# Altium PCB ATT-Open.PcbDoc
Units mm, origin at the board's own origin, x right, y up, seen from the top; angles counter-clockwise.
Board outline 140.3 x 94.24 mm, 2 copper layers (Top Layer, Bottom Layer); 105 components, 59 nets, 395 pads, 99 vias.
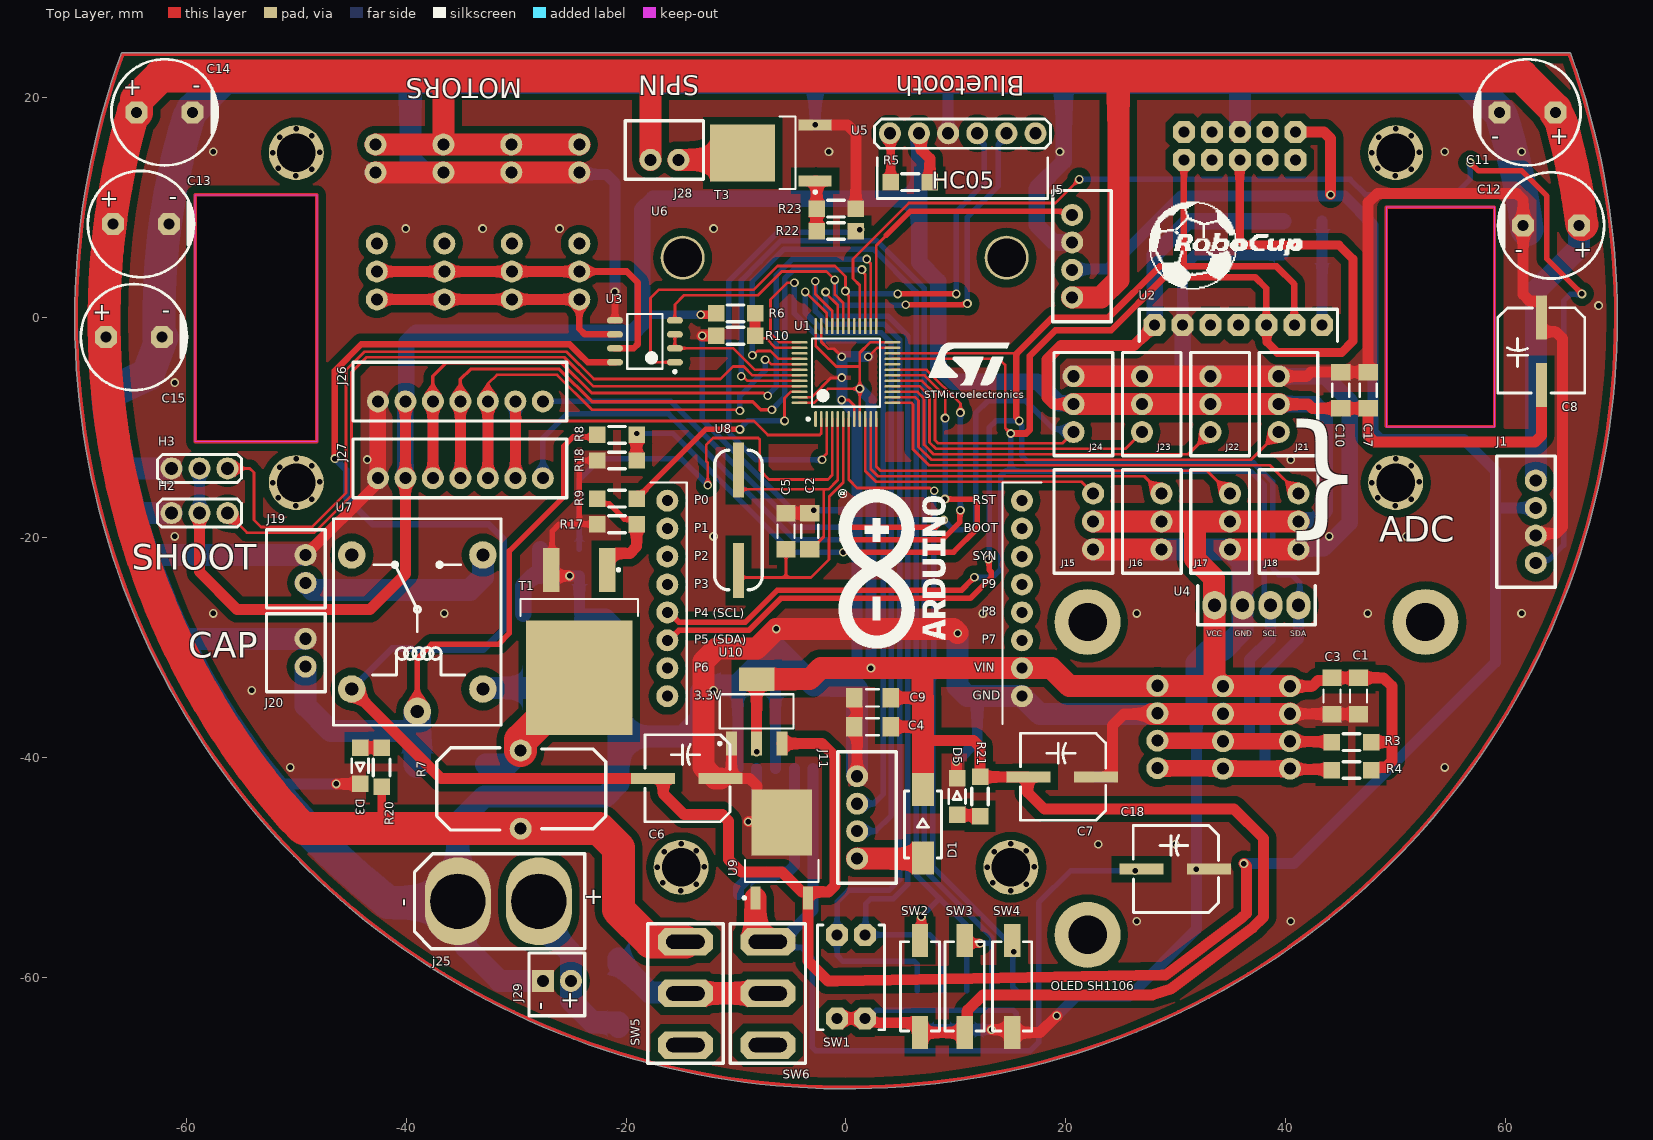
[diagram p0: Top Layer view]
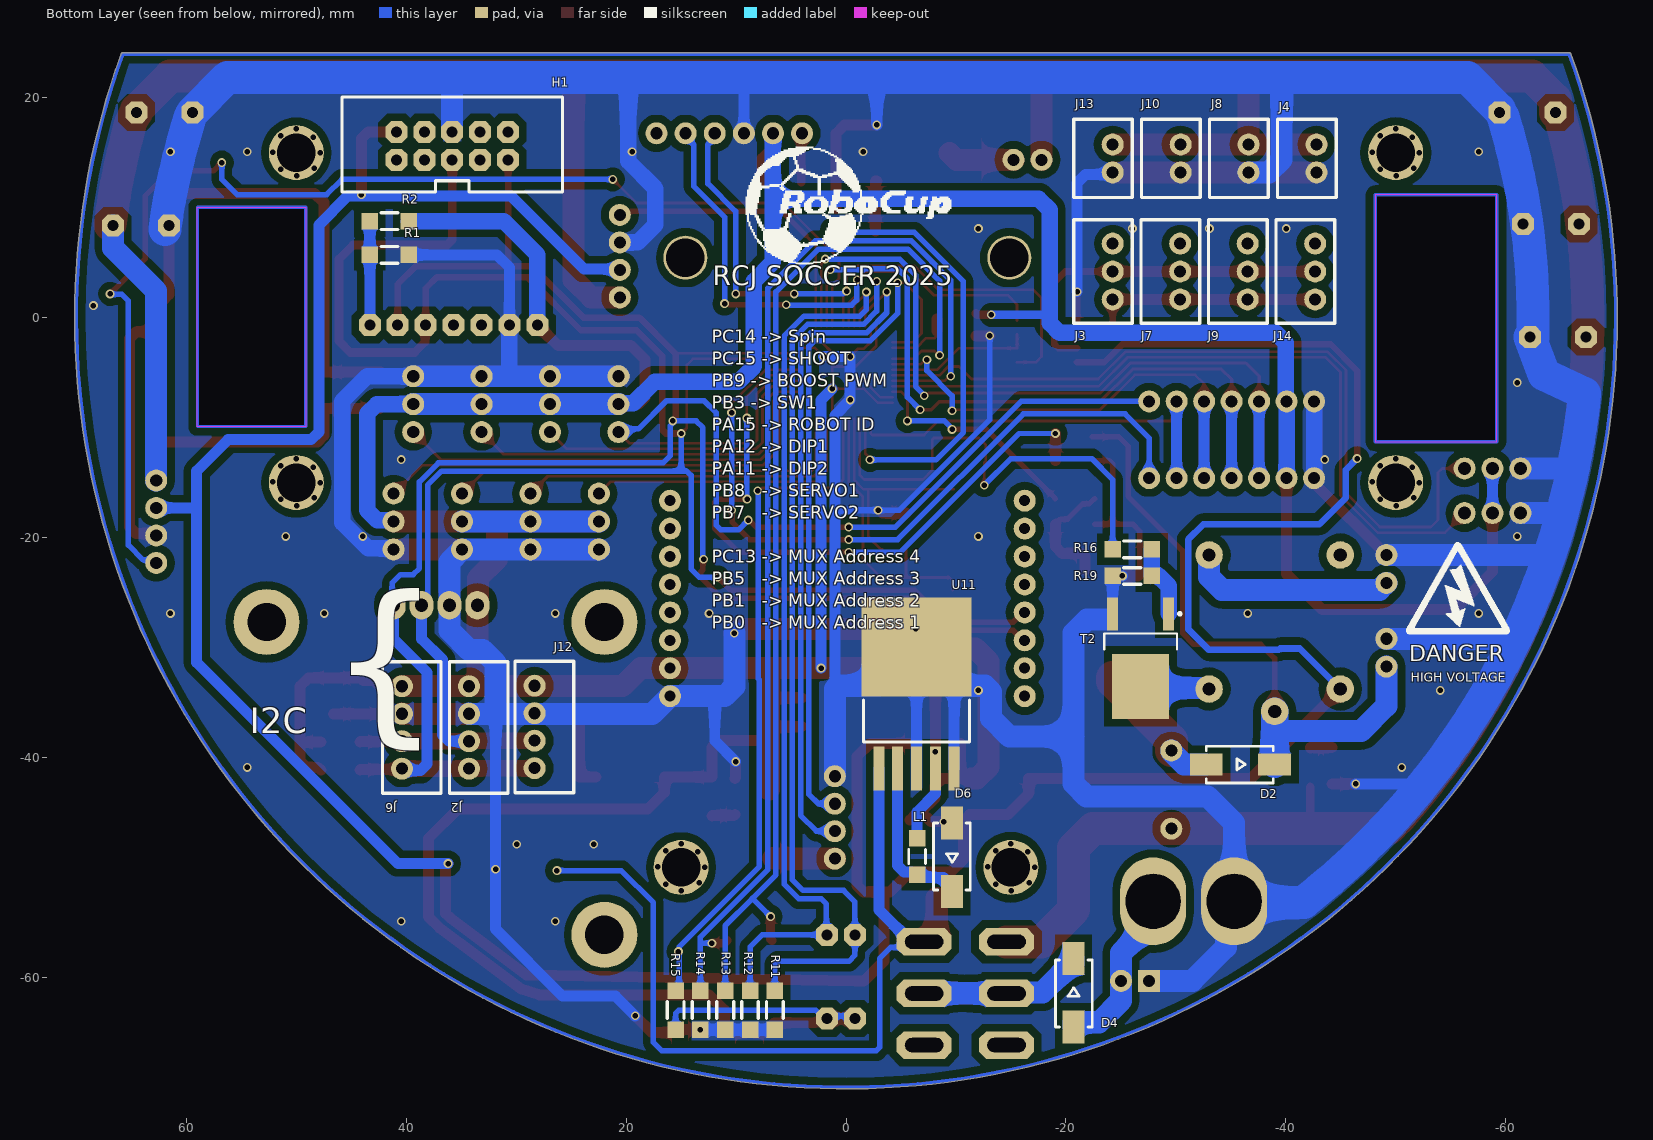
[diagram p1: Bottom Layer view, seen from below]

## Layer stack, top to bottom
Top Solder: solder mask 0.0102, Solder Resist, Dk 3.5
Top Layer: signal copper 0.0356
Dielectric 1: dielectric 0.32, FR-4, Dk 4.8
Bottom Layer: signal copper 0.0356
Bottom Solder: solder mask 0.0102, Solder Resist, Dk 3.5

## Board outline
-65.92,23.993 ccw(c0,0) 70.15,0 ccw(c0,0) 65.92,23.993 ccw(c65.778,23.941) 65.778,24.092 -65.778,24.092 ccw(c-65.778,23.941)
cut-out: 49.149,-9.906 58.987,-9.906 58.987,10.033 49.149,10.033
cut-out: -59.182,-11.303 -59.182,11.176 -48.133,11.176 -48.133,-11.303

## Design rules (kind name [scope] priority, off if disabled: settings)
Clearance [All] p1: gap=0.7 ignorepadtopadclearanceinfootprint=FALSE except(0: Arc-Hole Track-Hole SMDPad-Hole THPad-Hole Via-Hole Fill-Hole Poly-Hole Region-Hole Text-Hole; 0.25: Arc-Arc Arc-Track Arc-SMDPad Track-Track Track-SMDPad SMDPad-SMDPad; 0.254: Arc-THPad Arc-Via Arc-Text Track-THPad Track-Via Track-Text SMDPad-THPad SMDPad-Via SMDPad-Text THPad-THPad THPad-Via THPad-Text Via-Via Via-Text Fill-Text Poly-Text Region-Text Text-Text)
ComponentClearance [All] p1 off: gap=0.254 collisioncheckmode=3 verticalgap=0.254 showdistances=FALSE
Height [All] p1 off: minheight=0 maxheight=25.4 prefheight=12.7
PlaneConnect [All] p1: planeconnectstyle=Direct reliefexpansion=0.508 reliefentries=4 reliefconductorwidth=0.254 reliefairgap=0.254
PolygonConnect [All] p1: connectstyle=Direct reliefconductorwidth=0.254 reliefentries=4 polygonreliefangle="90 Angle" airgapwidth=0.254
RoutingVias [All] p1: holewidth=0.5 width=0.8 viastyle="Through Hole" minholewidth=0.5 minwidth=0.5 maxholewidth=0.5 maxwidth=1
SolderMaskExpansion [All] p1: expansion=0.102 istentingtop=FALSE
Width [All] p1: maxlimit=5 minlimit=0.25 preferedwidth=1
27 further rules are at their usual default settings.

## Classes and differential pairs
component class ATT-Open: C1 C2 C3 C4 C5 C6 C7 C8 C9 C10 C11 C12 C13 C14 C15 C17 C18 D1 D2 D3 D4 D5 D6 H1 H2 H3 J1 J2 J3 J4 J5 J6 J7 J8 J9 J10 J11 J12 J13 J14 J15 J16 J17 J18 J19 J20 J21 J22 J23 J24 j25 J26 J28 J29 L1 R1 R2 R3 R4 R5 R6 R7 R8 R9 R10 R11 R12 R13 R14 R15 R16 R17 R18 R19 R20 R21 R22 R23 SW1 SW2 SW3 SW4 SW5 SW6 T1 T2 T3 U1 U2 U3 U4 U5 U6 U7 U8 U9 U10 U11

## Components (designator, comment, footprint, x,y, rotation, side; value= is the part's Value field where it differs from the comment)
C1 "CAP" CAP1206 46.609,-34.417 r90 top
C2 "CAP" CAP1206 -3.302,-19.431 r90 top
C3 "CAP" CAP1206 44.196,-34.417 r90 top
C4 "CAP" CAP1206 2.413,-37.211 r0 top
C5 "CAP" CAP1206 -5.461,-19.431 r90 top
C6 "CAP" "CAP SMD 100uF 16V" -14.478,-41.91 r180 top
C7 "CAP" "CAP SMD 100uF 16V" 19.685,-41.783 r180 top
C8 "CAP" "CAP SMD 100uF 16V" 63.246,-3.048 r270 top
C9 "CAP" CAP1206 2.413,-34.586 r0 top
C10 "CAP" CAP1206 44.994,-6.604 r270 top
C11 "1000uF" "CAP 5x10x13 black" 61.976,18.669 r0 top
C12 "1000uF" "CAP 5x10x13 black" 64.135,8.382 r0 top
C13 "1000uF" "CAP 5x10x13 black" -64.135,8.509 r180 top
C14 "1000uF" "CAP 5x10x13 black" -61.976,18.669 r180 top
C15 "1000uF" "CAP 5x10x13 black" -64.77,-1.778 r180 top
C17 "CAP" CAP1206 47.498,-6.604 r270 top
C18 "CAP" "CAP SMD 100uF 16V" 29.95,-50.168 r180 top
D1 "DIODE" Diode 6.985,-46.101 r90 top
D2 "DIODE" Diode -35.814,-40.64 r180 bottom
D3 "LED" "LED GREEN 1206" -44.196,-40.767 r270 top
D4 "DIODE" Diode -20.701,-61.468 r90 bottom
D5 "LED" "LED GREEN 1206" 10.109,-43.561 r90 top
D6 "DIODE" Diode -9.652,-49.022 r270 bottom
H1 "IDC" "IDC 5x2" 35.941,16.002 r180 bottom
H2 "HEADER" "header 3 pin" -58.801,-17.78 r0 top
H3 "HEADER" "header 3 pin" -58.801,-13.716 r0 top
J1 "XH4" "XH 4PIN" 61.849,-18.559 r90 top
J2 "XH4" "XH 4PIN" 33.401,-37.281 r270 bottom
J3 "XH3" "XH 3PIN" -23.368,4.191 r90 bottom
J4 "XH2" "XH 2pin" -41.91,14.478 r90 bottom
J5 "XH4" "XH 4PIN" 21.463,5.588 r270 top
J6 "XH4" "XH 4PIN" 39.497,-37.281 r270 bottom
J7 "XH3" "XH 3PIN" -29.506,4.191 r90 bottom
J8 "XH2" "XH 2pin" -35.729,14.478 r90 bottom
J9 "XH3" "XH 3PIN" -35.645,4.191 r90 bottom
J10 "XH2" "XH 2pin" -29.549,14.478 r90 bottom
J11 "XH4" "XH 4PIN" 1.905,-45.466 r270 top
J12 "XH4" "XH 4PIN" 27.432,-37.234 r270 bottom
J13 "XH2" "XH 2pin" -23.368,14.478 r90 bottom
J14 "XH3" "XH 3PIN" -41.783,4.191 r90 bottom
J15 "XH3" "XH 3PIN" 21.59,-18.542 r90 top
J16 "XH3" "XH 3PIN" 27.813,-18.542 r90 top
J17 "XH3" "XH 3PIN" 34.036,-18.542 r90 top
J18 "XH3" "XH 3PIN" 40.259,-18.542 r90 top
J19 "XH2" "XH 2pin" -50.038,-22.86 r90 top locked
J20 "XH2" "XH 2pin" -50.038,-30.48 r90 top locked
J21 "XH3" "XH 3PIN" 40.251,-7.874 r270 top
J22 "XH3" "XH 3PIN" 34.03,-7.874 r270 top
J23 "XH3" "XH 3PIN" 27.81,-7.874 r270 top
J24 "XH3" "XH 3PIN" 21.59,-7.874 r270 top
j25 "XT60" XT60 -30.099,-53.086 r270 top
J26 "XH7" "XH 7PIN" -35.052,-9.144 r0 top
J27 "XH7" "XH 7PIN" -35.052,-16.129 r0 top
J28 "XH2" "XH 2pin" -16.51,15.24 r0 top
J29 "H2" "H2 MOLEX" -26.289,-60.706 r270 top
L1 "33uH" "Inductor 1206" -6.477,-49.022 r90 bottom
R1 "RES" RES1206 41.533,5.712 r0 bottom
R2 "RES" RES1206 41.533,8.766 r180 bottom
R3 "10K" RES1206 45.974,-38.608 r0 top
R4 "10K" RES1206 45.974,-41.148 r0 top
R5 "RES" RES1206 5.842,12.319 r180 top
R6 "10K" RES1206 -10.033,0.381 r180 top
R7 "100mH" inductor -29.718,-42.926 r90 top locked
R8 "10K" RES1206 -20.828,-10.666 r180 top
R9 "100" RES1206 -20.828,-16.468 r180 top
R10 "10K" RES1206 -10.033,-1.651 r0 top
R11 "10K" RES1206 6.477,-62.992 r270 bottom
R12 "10K" RES1206 8.731,-62.992 r270 bottom
R13 "10K" RES1206 10.983,-62.992 r270 bottom
R14 "10K" RES1206 13.237,-62.992 r270 bottom
R15 "10K" RES1206 15.491,-62.992 r90 bottom
R16 "100" RES1206 -26.035,-21.082 r0 bottom
R17 "10K" RES1206 -20.828,-18.796 r0 top
R18 "10K" RES1206 -20.828,-12.997 r0 top
R19 "10K" RES1206 -26.035,-23.498 r0 bottom
R20 "1K" RES1206 -42.228,-40.913 r270 top
R21 "1K" RES1206 12.192,-43.561 r90 top
R22 "100" RES1206 -0.889,7.874 r0 top
R23 "10K" RES1206 -0.889,9.906 r0 top
SW1 "DIP" "DIP Switch 2" 0.457,-60.071 r90 top
SW2 "Switch" pushbutton 6.731,-60.833 r90 top
SW3 "Switch" pushbutton 10.795,-60.833 r90 top
SW4 "Switch" pushbutton 15.113,-60.833 r90 top
SW5 "SW" "SPDT Switch" -14.732,-61.468 r0 top
SW6 "SW" "SPDT Switch" -7.239,-61.468 r0 top
T1 "IRF540" IRF540S -24.257,-29.591 r270 top
T2 "FDD" FDD6690A -26.797,-30.988 r270 bottom
T3 "FDD" FDD6690A -6.848,14.986 r180 top
U1 "STM32F103C8T6" STM32F103C8T6 0,-5 r90 top locked
U2 "TDAxis12" TDAxis12 35.687,10.414 r0 top locked
U3 "SN65LB" SN65LB -18.288,-2.159 r180 top
U4 "OLED" "OLED SH1106" 37.338,-41.91 r0 top locked
U5 "BT" HC05 10.597,11.464 r0 top
U6 "OpenMV" OpenMV 0,-15 r0 top locked
U7 "RELAY" "Relay 5V 10A" -38.989,-27.686 r270 top locked
U8 "Oscilator" "Crystal Oscilator" -9.779,-18.415 r90 top
U9 "7805" "7805 (SOT-252)" -5.842,-48.387 r90 top
U10 "1117" AMS1117 -8.128,-35.814 r90 top
U11 "LM2596" LM2596 -6.413,-32.512 r180 bottom
? "Comment" SCREW -50,-15 r0 top locked
? "Comment" SCREW -50,15 r0 top locked
? "Comment" SCREW -15,-50 r0 top locked
? "Comment" SCREW 15,-50 r0 top locked
? "Comment" SCREW 50,-15 r0 top locked
? "Comment" SCREW 50,15 r0 top locked

## Footprints (in the part's own frame and the unit in brackets; to place one, negate y for a bottom-side part, rotate by r counter-clockwise, add the part's x,y. Pads: shape width x height; smd on the part's side, far side on the other; paste and mask are expansions set on the pad)
"7805 (SOT-252)" [mm] "D-PAK, 3-Pads, Body 6.25x6.71mm (max), IPC Medium Density"
  rect 2.1x0.9 smd: 1(-4.4,2.4) 3(-4.4,-2.4)
  rect 6x5.5 smd: 4(2.45,0)
  silkscreen extent -4.52,-3.35 -0.95,3.52, body extent -5.06,-3.35 4.85,3.35, height 2.45
AMS1117 [mm] "SOT223, 4-Leads, Body 6.30x7.00mm (avg), Pitch 2.30mm, IPC Medium Density"
  rect 2.15x1 smd: 1(-2.925,2.3) 2(-2.925,0) 3(-2.925,-2.3)
  rect 2.15x3.25 smd: 4(2.925,0)
  silkscreen extent -3.05,-3.35 1.55,3.47, body extent -3.5,-3.35 3.5,3.35, height 1.65
CAP1206 [mm] "Chip Capacitor, 2-Leads, Body 3.20x1.60mm, IPC Medium Density"
  rect 1.5x1.75 smd: 1(-1.651,0) 2(1.651,0)
  silkscreen extent -0.6,-0.77 0.6,0.77, body extent -1.6,-0.8 1.6,0.8, height 1
"CAP 5x10x13 black" [mm]
  oct 2x2 hole 1: 1(-2.54,0) 2(2.54,0)
  silkscreen extent -4.83,-4.83 4.83,4.83, body extent -5,-5 5,5, height 13.1
"CAP SMD 100uF 16V" [mm]
  rect 4x1 smd: 1(-3.048,0) 2(3.07,0.003)
  silkscreen extent -3.94,-3.97 3.81,3.94, body extent -4.75,-4.15 4.75,4.15, height 10.51
"Crystal Oscilator" [mm]
  rect 5x1 smd: 1(-4.572,0) 2(4.572,0)
  silkscreen extent -6.35,-2.16 6.35,2.16, body extent -6.5,-2.35 6.5,2.35, height 4.21
Diode [mm]
  rect 3x2 smd: 1(-3.048,0) 2(3.175,0)
  silkscreen extent -3.06,-1.69 3.05,1.65, body extent -3.12,-1.78 3.12,1.78, height 2.26
"DIP Switch 2" [mm]
  oct 2x2 hole 1: 1(-3.683,1.27) 2(-3.683,-1.27) 3(3.937,1.27) 4(3.937,-1.27)
  silkscreen extent -4.7,-3.05 4.83,3.05, body extent -4.83,-3.3 5.07,3.3, height 6.8
FDD6690A [mm] "D-PAK, 3-Pads, Body 5.85x6.66mm (max), IPC Medium Density"
  rect 3x1 smd: 1(-4.05,2.54) 3(-4.05,-2.54)
  rect 5.9x5.2 smd: 4(2.55,0)
  silkscreen extent -4.17,-3.3 -0.8,3.69, body extent -5,-3.3 5,3.3, height 3.03
"H2 MOLEX" [mm]
  round 2 hole 1.1: 1(-0.381,1.27)
  rect 2x2 hole 1.1: 2(-0.381,-1.27)
  silkscreen extent -2.92,-2.54 2.79,2.54, body extent -2.9,-2.54 2.9,2.54, height 11.24
HC05 [mm]
  round 2 hole 1.1: 1(-6.605,5.3) 2(-3.956,5.3) 3(-1.308,5.3) 4(1.341,5.3) 5(3.99,5.3) 6(6.639,5.3)
  silkscreen extent -8,-0.64 8,6.6, body extent -8,-1 8,5.55, height 39.5
"header 3 pin" [mm]
  round 2 hole 1.2: 1(-2.54,0) 2(0,0) 3(2.54,0)
  silkscreen extent -3.81,-1.27 3.81,1.27, body extent -3.77,-1.25 3.73,1.25, height 8
"IDC 5x2" [mm]
  oct 2x2 hole 1: 1(-4.953,-1.651) 2(-4.953,0.889) 3(-2.413,-1.651) 4(-2.413,0.889) 5(0.127,-1.651) 6(0.127,0.889) 7(2.667,-1.651) 8(2.667,0.889) 9(5.207,-1.651) 10(5.207,0.889)
  silkscreen extent -9.91,-4.57 10.16,4.06, body extent -10.17,-4.78 10.43,4.32, height 9.3
inductor [mm]
  round 2 hole 1.1: 1(-3.556,-0.127) 2(3.556,-0.127)
  silkscreen extent -3.68,-7.87 3.81,7.49, body extent -4.15,-8.42 4.15,8.17, height 16.29
"Inductor 1206" [mm]
  rect 1.5x1.5 smd: 1(-1.651,0) 2(1.651,0)
  silkscreen extent -0.64,-0.76 0.64,0.76, body extent -1.1,-0.72 1.1,0.72, height 1.45
IRF540S [mm] "D2-PAK, 3-Pads, Body 7.93x8.70mm (max), IPC Medium Density"
  rect 4x1.5 smd: 1(-6.65,2.54) 3(-6.65,-2.54)
  rect 10.4x9.7 smd: 4(3.15,0)
  silkscreen extent -6.77,-5.35 -2.45,5.35, body extent -7.65,-5.33 7.6,5.33, height 5.08
"LED GREEN 1206" [mm]
  rect 1.5x1.5 smd: 1(-1.651,0) 2(1.651,0)
  silkscreen extent -0.64,-0.76 0.64,0.76, body extent -1.63,-0.83 1.64,0.82, height 0.9
LM2596 [mm]
  rect 1x4 smd: 1(-3.429,-8.509) 2(-1.715,-8.509) 3(0,-8.509) 4(1.714,-8.509) 5(3.429,-8.509)
  rect 10x9 smd: 6(0,2.54)
  silkscreen extent -4.83,-6.1 4.83,-2.29, body extent -5.1,-9.93 5.1,6.02, height 4.4
"OLED SH1106" [mm]
  oval 2.2x2.6 hole 1.2: 1(-3.81,15.748) 2(-1.27,15.748) 3(1.27,15.748) 4(3.81,15.748)
  round 6 hole 3.5: ""(-15.367,14.224) ""(-15.365,-14.23) ""(15.367,14.224)
  silkscreen extent -5.33,13.97 5.33,17.53, body extent -18,-17 18,17, height 11.6
OpenMV [mm]
  round 2 hole 1: 1(-16.256,-1.651) 2(-16.256,-4.191) 3(-16.256,-6.731) 4(-16.256,-9.271) 5(-16.256,-11.811) 6(-16.256,-14.351) 7(-16.256,-16.891) 8(-16.256,-19.431) 9(16.002,-19.431) 10(16.002,-16.891) 11(16.002,-14.351) 12(16.002,-11.811) 13(16.002,-9.271) 14(16.002,-6.731) 15(16.002,-4.191) 16(16.002,-1.651)
  round 4 hole 3.5: 17(14.605,20.447) 18(-14.859,20.447)
  silkscreen extent -17.78,-21.97 17.78,0, body extent -17.92,-22.12 17.9,23.58, height 38.95
pushbutton [mm]
  rect 3x1.5 smd: 1(-4.191,0) 2(4.191,0)
  silkscreen extent -4.06,-1.78 4.06,1.78, body extent -4.17,-1.82 4.17,1.82, height 4.25
"Relay 5V 10A" [mm]
  round 2.5 hole 1.2: 1(-6.096,5.969) 2(-6.096,-5.969) 3(6.096,-5.969) 4(6.096,5.969) 5(8.128,0)
  silkscreen extent -9.4,-7.62 9.4,7.62, body extent -9.6,-7.8 9.6,7.8, height 15.9
RES1206 [mm]
  rect 1.5x1.5 smd: 1(-1.778,0) 2(1.778,0)
  silkscreen extent -0.76,-0.76 0.76,0.76, body extent -1.58,-0.82 1.58,0.82, height 0.53
SCREW [mm]
  round 5 hole 3.5: 1(0,0)
  round 0 hole 0.5: ""(-2.159,0) ""(-1.651,-1.397) ""(-1.524,1.397) ""(-0.031,-2.11) ""(0,2.159) ""(1.397,-1.524) ""(1.397,1.524) ""(2.128,0.059)
SN65LB [mm] "SOP, 8-Leads, Body 4.90x3.90mm, Pitch 1.27mm, IPC Medium Density"
  oval 1.45x0.6 smd: 1(-2.725,1.905) 2(-2.725,0.635) 3(-2.725,-0.635) 4(-2.725,-1.905) 5(2.725,-1.905) 6(2.725,-0.635) 7(2.725,0.635) 8(2.725,1.905)
  silkscreen extent -2.85,-2.5 1.6,2.88, body extent -3,-2.5 3,2.5, height 1.75
"SPDT Switch" [mm]
  oct 5x2.5 hole 1.3 slot 3.5 at 0 deg: 1(0.127,4.699) 2(0.127,0) 3(0.127,-4.699)
  silkscreen extent -3.3,-6.35 3.56,6.35, body extent -3.3,-6.35 3.56,6.35, height 28.65
STM32F103C8T6 [mm] "TSQFP, 48-Leads, Body 7.00x7.00mm, Pitch 0.50mm, IPC Medium Density"
  oval 1.45x0.254 smd: 1(-4.224,2.762)
  oval 1.45x0.25 smd: 2(-4.225,2.25) 3(-4.225,1.75) 4(-4.225,1.25) 5(-4.225,0.75) 6(-4.225,0.25) 7(-4.225,-0.25) 8(-4.225,-0.75) 9(-4.225,-1.25) 10(-4.225,-1.75) 11(-4.225,-2.25) 12(-4.225,-2.75) 25(4.225,-2.75) 26(4.225,-2.25) 27(4.225,-1.75) 28(4.225,-1.25) 29(4.225,-0.75) 30(4.225,-0.25) 31(4.225,0.25) 32(4.225,0.75) 33(4.225,1.25) 34(4.225,1.75) 35(4.225,2.25) 36(4.225,2.75)
  oval 0.25x1.45 smd: 13(-2.75,-4.225) 14(-2.25,-4.225) 15(-1.75,-4.225) 16(-1.25,-4.225) 17(-0.75,-4.225) 18(-0.25,-4.225) 19(0.25,-4.225) 20(0.75,-4.225) 21(1.25,-4.225) 22(1.75,-4.225) 23(2.25,-4.225) 24(2.75,-4.225) 37(2.75,4.225) 38(2.25,4.225) 39(1.75,4.225) 40(1.25,4.225) 41(0.75,4.225) 42(0.25,4.225) 43(-0.25,4.225) 44(-0.75,4.225) 45(-1.25,4.225) 46(-1.75,4.225) 47(-2.25,4.225) 48(-2.75,4.225)
  silkscreen extent -4.35,-3.1 3.1,3.57, body extent -4.5,-4.5 4.5,4.5, height 1.6
TDAxis12 [mm]
  oct 2x2 hole 1: 1(-7.615,-11.093) 2(-5.075,-11.093) 3(-2.536,-11.093) 4(0.004,-11.093) 5(2.544,-11.093) 6(5.084,-11.093) 7(7.624,-11.093)
  silkscreen extent -9.02,-12.57 9.02,-9.65, body extent -10.5,-12.57 10.5,12.43, height 5.39
"XH 2pin" [mm]
  round 2 hole 1.1: 1(-1.27,-0.889) 2(1.27,-0.889)
  silkscreen extent -3.56,-2.67 3.56,2.67, body extent -3.7,-2.88 3.7,2.88, height 7
"XH 3PIN" [mm]
  round 2 hole 1.1: 1(-2.54,-0.889) 2(0,-0.889) 3(2.54,-0.889)
  silkscreen extent -4.7,-2.67 4.7,2.67, body extent -4.95,-2.88 4.95,2.88, height 7
"XH 4PIN" [mm]
  round 2 hole 1.1: 1(-3.753,-0.889) 2(-1.253,-0.889) 3(1.247,-0.889) 4(3.747,-0.889)
  silkscreen extent -5.97,-2.67 5.97,2.67, body extent -6.2,-2.88 6.2,2.88, height 7
"XH 7PIN" [mm]
  round 2 hole 1.1: 1(-7.523,1.524) 2(-5.023,1.524) 3(-2.523,1.524) 4(-0.023,1.524) 5(2.477,1.524) 6(4.977,1.524) 7(7.477,1.524)
  silkscreen extent -9.78,-0.25 9.65,5.08, body extent -9.95,-0.46 9.95,5.29, height 7
XT60 [mm]
  oval 8x6 hole 5: 1(0,2.159) 2(0,-5.207)
  silkscreen extent -4.32,-9.14 4.32,6.35, body extent -3.75,-9.72 3.75,6.83, height 16

## Part data
C1 C2 C3 C4 C5 C9 C10 C17: library part CAP1206, "Capacitor SMD 1206"
C6 C7 C8 C18: library part "CAP Electrolit SMD", "Capacitor Electrolit SMD"
C11 C12 C13 C14 C15: library part "Cap Electrolyte", "CAP DIP"
D1 D2 D4 D6: library part Diode
D3 D5: library part "LED SMD 1206", "LED SMD 1206"
H1: library part "IDC BOX 5x2", "IDC BOX 5x2"
H2 H3: library part "Header 3 pin"
J1 J2 J5 J6 J11 J12: library part "XH 4PIN", "XH Connector 4pins"
J3 J7 J9 J14 J15 J16 J17 J18 J21 J22 J23 J24: library part "XH 3PIN", "XH Connector 3pins"
J4 J8 J10 J13 J19 J20 J28: library part "XH 2PIN", "XH Connector 2pins"
j25: "XT60 Power Connector"
J26 J27: library part "XH 7Pin", "XH Connector 7pins"
J29: library part "H2 MOLEX", "molex connector"
L1: library part "Inductor 1206"
R1 R2 R3 R4 R5 R6 R8 R9 R10 R11 R12 R13 R14 R15 R16 R17 R18 R19 R20 R21 R22 R23: library part RES1206, "RESISTOR SMD"
R7: library part inductor, "SELF INDUCTOR"
SW1: library part "DIP SW 2", "DIP Switch 2 pin"
SW2 SW3 SW4: library part pushbutton, "Switch SMD Tact"
SW5 SW6: library part "SPDT Switch", "SPDT Power Switch"
T1: library part IRF540S, "IRF-540 MOSFET N-Chanel"
T2 T3: library part FDD6690A, "FDD6690A MOSFET N-Chanel"
U1: "STM32F103C8T6 / LQFP48"
U2: "Gyroscpoe Sensor"
U3: "BL DC MOTOR DRIVER"
U4: library part "OLED SH1106", "OLED SH1106 1.3inch"
U5: library part HC05, "Bluetooth HC05 Module"
U6: "OpenMV Camera H7 R2"
U7: library part "Relay 5V 10A"
U8: library part Crystal, "Crystal Oscilator 8MHz"
U9: library part "7805 (SOT-252)", "5v Regulator"
U10: library part AMS1117, "3.3v Regulator"
U11: "3.3v Regulator (Switching)"

## Via types
v1: diameter 0.8, hole 0.5, Top Layer to Bottom Layer, tented both sides, 99 vias

## Nets (pads, with @x,y where several pads share a name; then routed paths per layer and width w, separated by ;. In a path a pad name is that pad's centre, name@x,y a point inside that pad or via, vN(x,y) a via of type N, cw(c..) or ccw(c..) an arc to the next point about the centre after c; other vN are vias at no path point)
+5: C6.2 H1.2 J1.3 J5.3 U3.8 U7.3 U9.3 U10.3 | length 327.4
  Top Layer w0.6: v1(-46.482,-12.827) -46.482,-4.826 -44.088,-2.432 -25.14,-2.432 -24.27,-3.302 -24.257,-3.302 -23.495,-4.064 U3.8
  Top Layer w1: U7.3 -36.827,-41.913 C6.2 -16.617,-41.913 -16.617,-43.327 -14.732,-45.212 -11.254,-45.212 -10.668,-45.798 -10.668,-49.276 -9.525,-50.419 -5.81,-50.419 -3.992,-52.237 -3.492,-52.237 U9.3@-3.442,-52.287 ; U10.3 -2.177,-38.739 -1.016,-39.9 -1.016,-51.651 -1.602,-52.237 -3.392,-52.237 U9.3@-3.442,-52.287 ; v1(36.195,-49.657) 36.433,-49.895 36.433,-54.177 36.033,-54.577 29.075,-59.791 28.752,-59.797 -0.803,-60.345 -1.631,-60.345 -1.924,-60.052 -3.442,-58.534 U9.3 U9.3@-3.442,-52.287 ; H1.2 43.483,16.891 44.069,16.305 v1(44.069,11.176)
  Bottom Layer w0.6: v1(-46.482,-12.827) -45.466,-13.843 -45.466,-16.383 -43.053,-18.796 -32.512,-18.796 -31.115,-20.193 -31.115,-28.321 -33.02,-30.226 -39.37,-30.226 -39.497,-30.099 -41.275,-30.099 U7.3
  Bottom Layer w1: J5.3 20.638,4.405 23.836,4.405 30.48,11.049 45.339,11.049 47.949,8.439 47.949,-10.403 48.652,-11.106 56.191,-11.106 59.055,-13.97 59.055,-17.145 ; v1(36.195,-49.657) 40.767,-49.657 59.055,-31.369 59.055,-17.145 ; J1.3 59.222,-17.312 59.055,-17.145
+12: C11.2 C12.2 C13.2 C14.2 C15.2 J1.4 J4.2 J5.4 J8.2 J10.2 J13.2 J28.1 R7.1 R20.2 SW5.1 | length 340.6
  Top Layer w0.8: -42.291,-46.482 -42.228,-46.419 R20.2 ; -35.839,21.819 -35.687,21.971 ; -21.463,21.971 -21.412,21.92 ; 30.584,21.948 30.607,21.971 ; 44.679,21.819 44.831,21.971
  Top Layer w2: J4.2 J8.2 ; -35.839,21.819 -36.618,21.04 J8.2 ; J13.2 J10.2 J8.2 ; J28.1 -17.78,21.844 ; -16.129,21.844 -16.002,21.971 ; J5.4 23.177,1.841 24.765,3.429 24.765,21.971
  Top Layer w3: C14.2@-64.785,18.841 ccw(c0.932,-0.197) -50.369,-45.467 ccw(c0.932,-0.197) -50.306,-45.538 -50.241,-45.603 -49.362,-46.482 R7.1 -22.458,-46.482 -20.701,-48.239 -20.701,-53.848 -17.78,-56.769 SW5.1 ; C14.2 -64.516,19.833 -62.378,21.971 -35.687,21.971 -21.463,21.971 -16.002,21.971 30.607,21.971 44.831,21.971 61.468,21.971 C11.2@64.516,18.923 ; C11.2 64.521,18.665 64.578,18.593 cw(c62.225,16.733) 65.118,17.526 cw(c1.164,0.026) C12.2@66.93,8.46
  Bottom Layer w2: J1.4 62.738,2.413 66.675,6.35 C12.2
A: J3.1 J7.1 J9.1 J14.1 U3.6 | length 24.5
  Top Layer w0.6: J3.1 -24.257,-1.016 -23.749,-1.524 U3.6
  Top Layer w1: J14.1 J9.1 J7.1 J3.1
ADC0: J15.3 U1.10 | length 26.3
  Top Layer w0.25: U1.10 1.75,-13.959 2.721,-14.93 21.407,-14.93 J15.3
ADC1: J16.3 U1.11 | length 31.9
  Top Layer w0.25: U1.11 2.25,-13.752 2.928,-14.43 5.358,-14.43 27.13,-14.43 J16.3
ADC2: J17.3 U1.12 | length 37.5
  Top Layer w0.25: U1.12 2.75,-13.545 3.135,-13.93 32.853,-13.93 J17.3
ADC3: J18.3 U1.13 | length 42.7
  Top Layer w0.25: U1.13 5.95,-7.75 6.096,-7.896 6.096,-10.414 6.096,-11.972 7.554,-13.43 9.112,-13.43 38.576,-13.43 J18.3
ADC4: J21.3 U1.14 | length 41
  Top Layer w0.25: U1.14 6.303,-7.25 6.596,-7.543 6.596,-10.207 6.596,-11.765 7.761,-12.93 9.319,-12.93 36.846,-12.93 J21.3
ADC5: J22.3 U1.15 | length 34.6
  Top Layer w0.25: U1.15 6.51,-6.75 7.096,-7.336 7.096,-10 7.096,-11.558 7.968,-12.43 9.526,-12.43 31.125,-12.43 J22.3
ADC6: J23.3 U1.16 | length 28.2
  Top Layer w0.25: U1.16 6.717,-6.25 7.596,-7.129 7.596,-11.351 8.175,-11.93 25.405,-11.93 J23.3
ADC7: J24.3 J26.7 U1.17 | length 87.4
  Top Layer w0.25: U1.17 6.924,-5.75 8.096,-6.922 8.096,-11.144 8.382,-11.43 19.685,-11.43 J24.3
  Top Layer w0.5: v1(-0.254,-19.05) 8.174,-19.05 8.809,-18.415 v1(8.89,-18.415)
  Bottom Layer w0.5: J26.7 -15.92,-7.62 -4.49,-19.05 v1(-0.254,-19.05) ; v1(8.89,-18.415) 9.779,-19.304 11.375,-19.304 11.811,-18.868 11.811,-8.65 12.897,-7.563 16.326,-7.563 18.89,-10.127 20.414,-10.127 J24.3
ADC8: R8.1 R18.2 U1.18 | length 59.2
  Top Layer w0.25: U1.18 7.132,-5.25 9.017,-7.135 v1(9.017,-9.144)
  Top Layer w0.5: v1(-0.254,-21.336) 9.779,-21.336 11.938,-19.177 11.938,-16.803 11.645,-16.51 v1(9.002,-16.51)
  Top Layer w1: R18.2 v1(-19.05,-10.541)
  Bottom Layer w0.5: v1(-19.05,-10.541) -15.748,-10.541 -4.953,-21.336 v1(-0.254,-21.336) ; v1(9.002,-16.51) 9.009,-16.502 9.009,-9.152 v1(9.017,-9.144)
ADC9: J27.7 U1.19 | length 66.3
  Top Layer w0.25: U1.19 7.339,-4.75 10.414,-7.825 v1(10.414,-8.636)
  Top Layer w0.5: v1(-0.254,-20.193) 8.763,-20.193 10.357,-18.599 10.357,-17.583 v1(10.414,-17.526)
  Bottom Layer w0.25: v1@10.414,-17.653 v1(10.414,-17.526)
  Bottom Layer w0.5: J27.7 -27.575,-10.962 -25.376,-8.763 -16.129,-8.763 -4.699,-20.193 v1(-0.254,-20.193) ; v1(10.414,-17.526) v1(10.414,-8.636)
B: J3.2 J7.2 J9.2 J14.2 U3.7 | length 32
  Top Layer w0.6: J3.2 -19.939,4.191 -18.923,3.175 -18.923,-2.413 -19.304,-2.794 U3.7
  Top Layer w1: J14.2 J9.2 J7.2 J3.2
BOOST_CTRL: R9.1 U1.46 | length 20.1
  Top Layer w0.25: v1(-5.588,-9.398) -5.588,-7.306 -5.032,-6.75 U1.46
  Top Layer w0.5: R9.1 -12.759,-10.177 v1(-9.652,-10.177)
  Bottom Layer w0.5: v1(-9.652,-10.177) -9.652,-10.096 -8.954,-9.398 v1(-5.588,-9.398)
BOOT0: R14.1 SW3.2 U1.44 | length 103
  Top Layer w0.25: v1(-9.525,-5.334) -9.376,-5.334 -8.96,-5.75 U1.44
  Top Layer w0.8: SW3.2 11.049,-56.896 v1(12.192,-56.896)
  Bottom Layer w0.5: v1(-9.525,-5.334) -9.525,3.384 -7.817,5.092 -5.936,6.973 2.806,6.973 4.687,5.092 7.124,2.655 7.124,-50.232 13.237,-56.345 13.237,-57.023 ; v1@12.319,-56.896 13.11,-56.896 13.237,-57.023 ; R14.1 13.237,-57.023
DIP1: R12.1 SW1.4 U1.32 | length 82.3
  Top Layer w0.25: v1(-1.862,2.329) -1.862,2.243 -0.75,1.131 U1.32
  Bottom Layer w0.5: v1(-1.862,2.329) -1.862,0.719 -1.27,0.127 3.81,0.127 5.624,-1.687 5.624,-51.526 4.303,-52.847 2.271,-52.847 1.778,-53.34 1.778,-56.083 SW1.4 7.62,-56.134 8.731,-57.245 R12.1
DIP2: R11.1 SW1.3 U1.33 | length 86.7
  Top Layer w0.25: v1(-2.794,3.302) -2.794,2.159 -1.25,0.615 U1.33
  Bottom Layer w0.5: v1@-2.794,3.294 -2.794,0.59 -1.581,-0.623 3.499,-0.623 4.874,-1.998 4.874,-51.133 3.91,-52.097 0.227,-52.097 -0.813,-53.137 SW1.3 -0.813,-57.988 -0.254,-58.547 6.223,-58.547 6.477,-58.801 R11.1
EXT_SHOOT: J1.1 U1.28 | length 114
  Top Layer w0.25: U1.28 1.25,2.941 0.635,3.556 0.635,5.334 5.715,10.414 19.05,10.414 v1(21.209,12.573)
  Top Layer w0.5: v1(56.769,14.097) 57.531,13.335 61.468,13.335 63.754,11.049 63.754,5.334 v1(66.929,2.159)
  Bottom Layer w0.5: v1(21.209,12.573) 45.847,12.573 47.244,11.176 55.372,11.176 56.769,12.573 v1(56.769,14.097) ; J1.1 63.011,-22.039 63.94,-22.039 65.278,-20.701 65.278,1.524 65.856,2.102 66.872,2.102 v1(66.929,2.159)
GND: C1.1 C2.2 C3.1 C4.1 C5.2 C6.1 C7.1 C8.1 C9.1 C10.1 C11.1 C12.1 C13.1 C14.1 C15.1 C17.1 C18.1 D3.2 D5.2 D6.1 H1.6 H2.1 H3.1 J1.2 J2.2 J4.1 J5.2 J6.2 J8.1 J10.1 J11.1 J12.2 J13.1 J15.1 J16.1 J17.1 J18.1 J19.2 J20.2 J21.1 J22.1 J23.1 J24.1 j25.2 J26.1 J27.1 J29.2 R1.1 R10.1 R11.2 R12.2 R13.2 R14.2 R17.1 R18.1 R19.2 R23.2 SW4.1 T1.3 T2.3 T3.3 U1.8 U1.23 U1.35 U1.47 U2.2 U3.5 U4.2 U5.3 U6.9 U9.4 U10.1 U11.3 U11.5 U11.6 | length 951.4
  Top Layer w0.25: U1.47 -3.131,-7.25 -1.342,-5.461 v1(-0.381,-5.461) ; U1.35 -2.25,-2.195 -1.622,-2.823 -1.114,-2.823 v1(-0.381,-3.556) ; v1(-0.381,-7.493) 0.254,-7.493 0.75,-7.989 U1.8 ; v1(2.032,-3.556) 2.838,-2.75 U1.23
  Top Layer w0.5: T1.3 -26.729,-22.873 -26.729,-19.441 -26.084,-18.796 -24.257,-18.796 ; R17.1 -24.257,-18.796 ; R18.1 -23.964,-12.997 -24.257,-13.29 -24.257,-18.796
  Top Layer w0.6: U3.5 v1(-21.013,2.355)
  Top Layer w1: J19.2 -42.766,-15.207 -42.766,-14.796 J27.1 ; v1(-46.355,-42.418) D3.2 ; T1.3 -26.797,-23.245 -26.547,-23.495 v1(-25.146,-23.495) ; v1(-13.081,-1.651) R10.1 ; C6.1 C6.1@-10.428,-41.91 ; U10.1 C6.1@-10.428,-41.91 ; v1(-8.89,-45.847) -7.747,-45.847 U9.4@-7.366,-45.466 ; U9.4@-6.84,-44.939 -8.092,-43.687 -8.092,-42.581 -8.763,-41.91 C6.1@-10.428,-41.91 ; U9.4@-6.271,-45.258 U9.4@-5.842,-45.687 ; C5.2 C2.2 ; v1(-2.798,17.526) 0.127,17.526 0.889,16.764 R23.2 ; C9.1 0.762,-34.711 1.016,-34.965 J11.1 ; v1(10.033,-40.386) 10.033,-41.834 D5.2 ; v1(13.237,-64.77) 14.863,-64.77 15.113,-65.02 SW4.1 17.653,-65.024 v1(19.177,-63.5) ; J24.1@20.637,-5.27 J24.1 ; C7.1 24.233,-41.783 24.233,-37.108 25.273,-36.068 J12.2@27.813,-36.068 ; 30.607,-5.334 30.612,-5.329 ; J21.1 41.935,-5.334 42.316,-4.953 C10.1 C17.1 ; J6.2 40.406,-36.048 46.589,-36.048 C1.1 ; C17.1@47.498,-4.703 47.498,10.463 48.338,11.303 61.009,11.303 61.595,10.717 C12.1 61.595,2.086 62.181,1.5 63.246,1.5 C8.1 ; C17.1@47.502,-4.953 C17.1 ; C17.1@47.873,-4.578 47.873,-4.703 47.623,-4.953 C17.1 ; J1.2 62.929,-19.621 64.565,-19.621 65.151,-19.035 65.151,-1.888 64.565,-1.302 C8.1@63.246,-1.302
  Top Layer w1.5: J27.1 J26.1
  Top Layer w2: J4.1 J8.1 J10.1 J13.1 ; C6.1 -11.93,-41.91 -12.954,-40.886 -12.954,-31.271 -11.782,-30.099 -8.128,-30.099 v1(-6.35,-28.321) 9.779,-28.321 v1(10.16,-28.702) ; J24.1 J23.1 30.607,-5.334 J22.1 J21.1 ; J15.1 J16.1 ; J12.2@27.813,-36.068 40.346,-36.068 J6.2 ; J17.1 J18.1
  Top Layer w3: j25.2@-35.433,-53.213 j25.2
  Bottom Layer w0.5: v1(-13.081,-1.651) -13.081,-9.271 -4.826,-17.526 v1(-2.921,-17.526)
  Bottom Layer w0.6: v1(-2.921,-17.526) 1.016,-17.526
  Bottom Layer w1: -52.815,-42.075 -52.472,-42.418 v1(-46.355,-42.418) ; v1(-25.146,-23.495) -24.26,-23.495 R19.2 T2.3 ; J13.1 -24.066,13.017 -21.78,13.017 -21.013,12.25 v1(-21.013,2.355) ; U11.5 U11.6@-9.842,-33.401 ; U11.3 U11.6 ; v1(-2.798,17.526) -2.798,21.844 ; 1.016,-33.782 1.016,-17.526 1.016,-8.89 v1(-0.381,-7.493) v1(-0.381,-5.461) v1(-0.381,-3.556) v1(2.032,-3.556) ; R11.2 R12.2 R13.2 v1(13.237,-64.77) ; U5.3 9.289,21.481 9.652,21.844 ; v1(10.033,-40.386) 11.938,-38.481 11.938,-34.431 ; v1(19.177,-63.5) 20.955,-61.722 25.781,-61.722 31.877,-55.626 v1(31.877,-50.165) 31.877,-36.068 ; U2.2 30.612,4.577 31.747,5.712 R1.1
  Bottom Layer w1.5: -66.793,-9.994 -66.753,-10.033 ; J19.2 J19.2@-49.053,-21.494 ; J27.1@-42.671,-14.701 J27.1 J26.1 ; 19.812,21.844 19.812,14.224 17.33,11.742 17.33,8.451 18.94,6.841 J5.2 ; J24.1@20.637,-5.27 J24.1 ; U2.2 30.612,-5.212 30.734,-5.334 ; J21.1 43.561,-5.334 45.819,-7.592 45.819,-18.642 43.475,-20.986 41.244,-20.986 J18.1
  Bottom Layer w2: -66.155,-13.586 -66.025,-13.716 H3.1 ; -65.134,-17.845 -65.069,-17.78 H2.1 ; -64.068,-21.356 -63.834,-21.59 J19.2 ; -60.927,-29.128 -60.845,-29.21 J20.2 ; -39.624,21.844 -39.624,14.38 -38.452,13.208 J8.1 ; J29.2 -31.496,-60.325 -34.541,-57.28 -34.541,-53.851 j25.2 -35.306,-45.974 -32.893,-43.561 -21.873,-43.561 -20.701,-42.389 -20.701,-38.1 ; T2.3@-23.757,-27.438 -21.938,-27.438 -20.701,-28.675 -20.701,-38.1 ; J11.1 1.016,-33.782 0.706,-33.472 -2.913,-33.472 U11.6 -9.842,-33.401 -9.914,-33.472 -12.644,-33.472 -13.208,-34.036 -13.208,-36.449 -14.859,-38.1 -20.701,-38.1 ; v1(10.16,-28.702) 10.16,-33.556 11.035,-34.431 11.938,-34.431 U6.9 17.639,-36.068 31.877,-36.068 ; J24.1 J23.1 J22.1 J21.1 ; J15.1 J16.1 J17.1 36.068,-22.225 U4.2 36.068,-28.448 34.29,-30.226 33.049,-30.226 31.877,-31.398 31.877,-36.068 ; J2.2 34.25,-36.068 31.877,-36.068 ; H1.6 35.814,21.717 35.941,21.844
  Bottom Layer w3: C15.1@-62.473,-1.822 cw(c0,0) C14.1@-59.769,18.273 ; C15.1@-62.234,-1.778 -63.479,-5.177 -67.184,-6.895 ccw(c-0.037,0.005) -66.793,-9.994 ccw(c-0.037,0.005) -66.155,-13.586 ccw(c-0.037,0.005) -65.134,-17.845 ccw(c-0.037,0.005) -64.068,-21.356 ccw(c-0.037,0.005) -60.927,-29.128 ccw(c-0.037,0.005) -52.815,-42.075 ccw(c-0.037,0.005) -41.875,-52.965 ; C14.1@-59.436,18.923 -56.515,21.844 -39.624,21.844 -2.798,21.844 9.652,21.844 19.812,21.844 35.941,21.844 56.261,21.844 C11.1 ; -41.656,-53.213 j25.2@-35.433,-53.213 ; C11.1@59.589,18.419 cw(c2.328,-0.068) C12.1@61.954,8.015
  other v1: 26.452,-54.907 40.452,-54.907 22.952,-47.907 29.952,-47.907 -50.548,-40.907 54.452,-40.907 -54.048,-33.907 -12.048,-33.907 -57.548,-26.907 -36.548,-26.907 12.452,-26.907 26.452,-26.907 47.452,-26.907 61.452,-26.907 -61.048,-19.907 -12.048,-19.907 43.952,-19.907 50.952,-19.907 -43.548,-12.907 40.452,-12.907 -61.048,-5.907 68.452,1.093 -40.048,8.093 -33.048,8.093 -26.048,8.093 -12.048,8.093 -57.548,15.093 -1.548,15.093 19.452,15.093 54.452,15.093 61.452,15.093
ID: R6.1 R10.2 U1.38 | length 5.6
  Top Layer w0.25: R10.2 -8.038,-1.868 -7.276,-1.868 -6.394,-2.75 -4.825,-2.75 U1.38
  Top Layer w1: R10.2@-8.255,-1.231 R6.1@-8.255,-0.127
IO: U1.42 U3.2 U3.3 | length 13.4
  Top Layer w0.25: U3.3 U3.2 -10.246,-2.794 -8.29,-4.75 U1.42
MUX_ADD1: J26.3 J27.3 U1.26 | length 74.8
  Top Layer w0.25: v1(1.89,5.319) 1.89,5.258 2.25,4.898 U1.26
  Top Layer w0.3: J26.3 -37.575,-5.317 -36.39,-4.132 -25.844,-4.132 -23.118,-6.858 -7.501,-6.858 -7.247,-7.112 v1(-7.112,-7.112)
  Top Layer w1: J27.3 J26.3
  Bottom Layer w0.5: v1(-7.112,-7.112) -7.112,-7.034 -6.338,-6.26 -6.338,3.86 -4.879,5.319 v1(1.89,5.319)
  Bottom Layer w1: J27.3 J26.3
MUX_ADD2: J26.4 J27.4 U1.27 | length 71.3
  Top Layer w0.25: v1(1.443,4.364) 1.443,4.215 1.75,3.909 U1.27
  Top Layer w0.3: J26.4 -35.075,-5.611 -34.146,-4.682 -26.072,-4.682 -23.092,-7.662 -8.467,-7.662 -7.747,-8.382 v1(-6.731,-8.382)
  Top Layer w1: J27.4 J26.4
  Bottom Layer w0.5: v1(-6.731,-8.382) -5.588,-7.239 -5.588,3.549 -4.692,4.445 -1.705,4.445 -1.625,4.364 v1(1.443,4.364)
  Bottom Layer w1: J27.4 J26.4
MUX_ADD3: J26.5 J27.5 U1.41 | length 49.1
  Top Layer w0.25: J26.5 -32.553,-7.598 -32.553,-6.01 -31.75,-5.207 -26.289,-5.207 -23.114,-8.382 -9.736,-8.382 v1(-9.652,-8.466) ; v1(-7.366,-3.827) -7.217,-3.827 -6.794,-4.25 U1.41
  Top Layer w1: J27.5 J26.5
  Bottom Layer w0.5: v1(-9.652,-8.466) -9.652,-7.112 -7.366,-4.826 v1(-7.366,-3.827)
  Bottom Layer w1: J27.5 J26.5
MUX_ADD4: J26.6 J27.6 U1.2 | length 43.9
  Top Layer w0.25: -30.075,-8.914 -29.591,-9.398 -8.382,-9.398 -7.112,-10.668 -2.396,-10.668 -2.25,-10.522 U1.2
  Top Layer w1: J27.6 -30.075,-8.914 J26.6
  Bottom Layer w1: J27.6 J26.6
NetC18_2: C18.2 SW6.1 U9.1 U11.1 | length 79.3
  Top Layer w2: U9.1 -8.242,-56.019 -7.492,-56.769 SW6.1
  Bottom Layer w0.5: SW6.1 -6.591,-57.29 -4.051,-57.29 -3.048,-58.293 -3.048,-66.382 -2.755,-66.675 16.764,-66.675 17.526,-65.913 17.526,-53.213 20.447,-50.292 v1(26.289,-50.292)
  Bottom Layer w1: SW6.1 -5.862,-56.769 -2.984,-53.892 U11.1
NetD1_1: D1.1 J11.4 | length 5.7
  Top Layer w2: J11.4 6.604,-49.213 D1.1@6.604,-49.149
NetD2_1: D2.1 R7.2 T1.4 | length 12.6
  Top Layer w3: R7.2 -29.591,-38.425 -24.257,-33.091 T1.4
  Bottom Layer w2: D2.1 -30.763,-40.64 -29.591,-39.468 R7.2
NetD3_1: D3.1 R20.1 | length 2
  Top Layer w1: D3.1 -42.247,-39.116 R20.1
NetD4_1: D4.1 j25.1 J29.1 | length 15.8
  Bottom Layer w2: j25.1 -27.94,-54.864 -25.019,-57.785 -25.019,-62.103 -23.025,-64.097 -20.701,-64.097 D4.1
NetD4_2: D4.2 SW5.2 SW6.2 | length 22.7
  Top Layer w2: SW5.2 SW6.2
  Bottom Layer w2: D4.2 -20.701,-58.793 -20.455,-58.793 -17.876,-61.372 -14.701,-61.372 SW5.2 SW6.2
NetD5_1: D5.1 R21.1 | length 2.1
  Top Layer w1: D5.1 10.173,-45.276 12.128,-45.276 R21.1
NetD6_2: D6.2 L1.1 U11.2 | length 15.1
  Bottom Layer w1: D6.2@-9.779,-52.451 -9.779,-51.824 -8.878,-50.923 -6.727,-50.923 L1.1 ; L1.1@-6.223,-50.673 -5.973,-50.423 -5.285,-50.423 -4.699,-49.837 U11.2
NetJ19_1: J19.1 U7.1 | length 18.9
  Bottom Layer w2: J19.1 -48.514,-24.765 -34.199,-24.765 -33.027,-23.593 -33.027,-21.597 U7.1
NetJ28_2: J28.2 T3.4 | length 6.1
  Top Layer w2: J28.2 -10.033,14.351 T3.4
NetR1_2: R1.2 R2.1 U2.7 | length 9.4
  Bottom Layer w1: U2.7 R1.2 R2.1
NetR5_2: R5.2 U5.1 | length 4.5
  Top Layer w0.8: U5.1 4.064,16.692 R5.2
NetR9_2: R9.2 R17.2 T1.1 | length 10.8
  Top Layer w0.5: R9.2 -22.122,-16.952 -21.529,-16.952 -20.148,-18.333 -19.513,-18.333 R17.2
  Top Layer w1: T1.1 -21.717,-21.691 -21.467,-21.441 -19.663,-21.441 -19.05,-20.828 R17.2
NetR16_1: R16.1 R19.1 T2.1 | length 6.9
  Bottom Layer w1.5: T2.1 -29.337,-24.376 -28.458,-23.498 R19.1 R16.1
NetR22_1: R22.1 R23.1 T3.1 | length 4.7
  Top Layer w1: T3.1 -2.667,12.446 R23.1 R22.1
NetT2_4: T2.4 U7.4 | length 6.3
  Bottom Layer w2: U7.4 -32.924,-33.686 -26.945,-33.686 T2.4
NRST: R15.2 SW4.2 U1.7 | length 62.4
  Top Layer w0.25: U1.7 0.25,-14.728 1.016,-15.494 7.625,-15.494 7.879,-15.748 v1(8.028,-15.748)
  Bottom Layer w0.5: v1(8.028,-15.748) 7.986,-15.79 7.986,-32.84 7.874,-32.952 7.874,-49.921 15.181,-57.229 15.181,-57.657 15.181,-60.904 R15.2
  other v1: 15.239,-57.657
OSC_IN: C2.1 U1.5 U8.2 | length 21
  Top Layer w0.25: U8.2@-9.779,-15.621 -1.905,-15.621 ; C2.1 -3.177,-21.082 -2.024,-19.929 -2.024,-15.74 -1.905,-15.621 ; U1.5 -0.75,-14.775 -1.596,-15.621 -1.905,-15.621
OSC_OUT: C5.1 U1.6 U8.1 | length 25.7
  Top Layer w0.25: U8.1@-9.714,-24.765 -9.714,-23.942 -9.404,-23.632 -5.461,-23.632 ; C5.1 -5.461,-23.632 ; U1.6 -0.25,-14.982 -1.524,-16.256 -1.524,-20.136 -1.541,-20.153 -1.541,-21.988 -3.185,-23.632 -5.461,-23.632
RCJ_COM: J5.1 U1.25 | length 26.6
  Top Layer w0.25: U1.25 2.75,6.56 3.683,7.493
  Top Layer w0.5: 3.683,7.493 5.842,9.652 19.531,9.652 19.555,9.628 20.287,9.628 J5.1
RX: U1.30 U3.1 U5.4 | length 57.8
  Top Layer w0.25: U3.1 -17.272,-4.064 -17.78,-3.556 -17.78,1.778 -17.018,2.54 -8.382,2.54 -6.231,4.691 -1.008,4.691 -0.054,3.737 v1(-0.054,2.416) -0.054,2.267 0.25,1.963 U1.30
  Top Layer w0.5: v1(4.699,2.159) v1(10.033,2.159)
  Bottom Layer w0.5: v1(-0.054,2.416) 0.027,2.416 0.284,2.159 v1(4.699,2.159) ; v1(10.033,2.159) 10.033,9.652 12.573,12.192 12.573,15.723 11.938,16.358 U5.4
SCL: H1.5 J2.3 J6.3 J12.3 R3.1 U1.21 U2.5 U4.3 U6.5 | length 201.7
  Top Layer w0.25: U1.21 13.91,-3.75 14.478,-4.318 14.478,-10.033 v1(14.986,-10.541)
  Top Layer w0.5: U6.5 -16.088,-26.811 -15.213,-27.686 -9.144,-27.686 -6.235,-24.777 10.529,-24.777 v1@11.43,-23.876
  Top Layer w0.6: v1(14.986,-10.541) 16.379,-10.541 16.73,-10.19 16.73,-3.463 19.05,-1.143 24.13,-1.143 28.956,3.683 37.211,3.683 38.231,2.663 U2.5
  Top Layer w0.8: H1.5 35.814,7.073 36.283,6.604 44.831,6.604 46.101,5.334 46.101,-2.159 45.085,-3.175 39.243,-3.175 38.287,-2.219 38.287,-0.735 U2.5
  Top Layer w1: J6.3 40.426,-38.568 44.156,-38.568 R3.1
  Top Layer w1.5: J12.3 28.345,-38.505 34.266,-38.505 J2.3 J6.3
  Bottom Layer w0.3: U4.3 U4.3@38.608,-25.448
  Bottom Layer w0.5: v1(11.684,-23.622) 13.335,-23.622 14.097,-22.86 14.097,-14.351 14.49,-13.958 14.986,-13.958 ; v1(14.986,-10.541) 14.986,-13.958 ; U4.3 38.058,-25.612 38.058,-15.243 36.773,-13.958 14.986,-13.958
  Bottom Layer w1: J2.3 36.117,-38.528 36.703,-37.942 36.703,-31.115 38.608,-29.21 U4.3
SDA: H1.9 J2.4 J6.4 J12.4 R4.1 U1.22 U2.6 U4.4 U6.6 | length 183.4
  Top Layer w0.25: U1.22 15.494,-3.25
  Top Layer w0.5: U6.6 -16.116,-29.351 -15.213,-28.448 -8.845,-28.448 -5.924,-25.527 11.303,-25.527 13.193,-23.637 13.193,-23.137 13.011,-22.955 13.011,-22.028 v1(12.954,-21.971)
  Top Layer w0.6: v1(15.765,-9.398) 15.765,-9.344 15.494,-9.073 15.494,-3.302 15.765,-3.031 18.796,0 23.876,0 28.536,4.66 30.734,4.66 ; H1.9 30.734,4.66 ; U2.6 40.771,3.044 39.155,4.66 30.734,4.66
  Top Layer w1: J6.4 40.446,-41.088 44.136,-41.088 R4.1
  Top Layer w1.5: J12.4 28.345,-41.004 34.266,-41.004 J2.4 J6.4
  Bottom Layer w0.5: v1(12.954,-21.971) 13.011,-21.914 13.011,-10.014 13.628,-9.398 v1(15.765,-9.398) ; v1@15.546,-9.398 16.002,-9.854 16.002,-12.573 16.637,-13.208 37.084,-13.208 38.808,-14.932 38.808,-22.806 39.37,-23.368 40.513,-23.368 41.275,-24.13 U4.4@41.275,-26.543
  Bottom Layer w1: J6.4 40.221,-41.193 38.686,-41.193 38.1,-40.607 38.1,-32.258 41.148,-29.21 U4.4
SERVO1: H2.3 U1.45 | length 67
  Top Layer w0.25: H2.3 -54.483,-19.558 -48.354,-19.558 -44.966,-16.17 -44.966,-4.972 -43.601,-3.607 -25.626,-3.607 -22.983,-6.25 U1.45
SERVO2: H3.3 U1.43 | length 71.8
  Top Layer w0.25: H3.3 -54.229,-13.716 -53.848,-14.097 -53.848,-18.415 -53.213,-19.05 -48.554,-19.05 -45.466,-15.962 -45.466,-4.765 -43.808,-3.107 -25.419,-3.107 -22.938,-5.588 -11.43,-5.588 -10.287,-4.445 -9.302,-4.445 -8.497,-5.25 U1.43
SHOOT: R16.2 U1.4 | length 43.7
  Top Layer w0.25: v1(-12.573,-15.24) -12.573,-13.197 -12.7,-13.07 -12.7,-11.557 -12.099,-10.956 -7.989,-10.956 -7.842,-11.102 -7.842,-13.875 -6.985,-14.732 -1.651,-14.732 -1.25,-14.331 U1.4
  Bottom Layer w0.5: R16.2 -24.257,-14.732 -22.352,-12.827 -14.986,-12.827 v1(-12.573,-15.24)
SPIN: R22.2 U1.3 | length 41.5
  Top Layer w0.25: v1(-2.18,-12.933) -2.18,-12.785 -1.75,-12.355 U1.3
  Top Layer w0.6: R22.2 1.143,7.874 v1(1.27,8.001)
  Bottom Layer w0.5: v1(-2.18,-12.933) -8.174,-12.933 -10.668,-10.439 -10.668,3.302 -6.223,7.747 0.935,7.747 1.189,8.001 v1(1.27,8.001)
SW1: R13.1 SW2.2 U1.40 | length 99.2
  Top Layer w0.25: v1(-8.509,-3.429) -8.429,-3.429 -8.048,-3.048 -6.858,-3.048 -6.156,-3.75 U1.40
  Top Layer w0.8: SW2.2 6.858,-56.515 v1(6.858,-54.483)
  Bottom Layer w0.5: v1(-8.509,-3.429) -8.509,3.34 -5.626,6.223 2.495,6.223 6.374,2.344 6.374,-50.697 8.509,-52.832 ; v1(6.858,-54.483) 8.509,-52.832 ; R13.1 10.983,-55.306 8.509,-52.832
SWCLK: J11.2 U1.37 | length 64.4
  Top Layer w0.25: v1(-4.684,3.175) -5.334,3.175 -6.858,1.651 -6.858,-1.452 -6.06,-2.25 U1.37
  Bottom Layer w0.5: v1(-4.684,3.175) -4.699,3.16 -4.699,0.374 -2.202,-2.123 2.878,-2.123 3.374,-2.619 3.374,-43.362 2.523,-44.213 J11.2
SWIO: J11.3 U1.34 | length 61.5
  Top Layer w0.25: v1(-3.706,2.341) -3.683,2.341 -1.75,0.408 U1.34
  Bottom Layer w0.5: v1(-3.706,2.341) -3.706,0.442 -1.891,-1.373 3.189,-1.373 4.124,-2.308 4.124,-45.279 2.69,-46.713 J11.3
TX: U1.31 U3.4 U5.5 | length 53.1
  Top Layer w0.25: U3.4 -15.563,1.201 -14.732,2.032 -8.001,2.032 -5.842,4.191 -1.778,4.191 v1(-1.016,3.429) -1.016,2.104 -0.25,1.338 U1.31
  Top Layer w0.5: v1(5.437,1.167) 10.611,1.167 10.656,1.213 10.992,1.213 v1(11.049,1.27)
  Bottom Layer w0.5: v1(-1.016,3.429) -0.959,3.372 -0.959,2.704 ; -0.958,2.703 -0.958,1.593 -0.508,1.143 5.413,1.143 v1(5.437,1.167) ; v1(11.049,1.27) 11.049,9.144 13.843,11.938 13.843,15.721 14.587,16.465 U5.5
VBOOST: D2.2 J20.1 R8.2 U7.5 | length 56.3
  Top Layer w0.5: U7.5 -38.989,-30.988 -37.719,-29.718 -31.623,-29.718 -30.607,-28.702 -30.607,-21.209 -25.654,-16.256 -25.654,-11.684 -24.829,-10.859 R8.2@-22.413,-10.859
  Bottom Layer w2: J20.1 -49.149,-35.306 -46.863,-37.592 -38.989,-37.592
  Bottom Layer w2.5: D2.2 -38.989,-37.592 U7.5
VCC: C1.2 C3.2 C4.2 C7.2 C8.2 C9.2 C10.2 C17.2 D1.2 H2.2 H3.2 J2.1 J6.1 J12.1 J15.2 J16.2 J17.2 J18.2 J21.2 J22.2 J23.2 J24.2 J26.2 J27.2 L1.2 R2.2 R3.2 R4.2 R5.1 R6.2 R15.1 R21.2 SW1.1 SW1.2 SW2.1 SW3.1 U1.9 U1.24 U1.36 U1.48 U2.1 U4.1 U5.2 U6.10 U10.2 U10.4 U11.4 | length 587.7
  Top Layer w0.25: U1.48 -2.924,-7.75 -1.651,-6.477 v1@1.25,-6.477 ; U1.36 -2.75,-2.584 -0.889,-4.445 1.25,-4.445 ; U1.9 v1@1.25,-6.477 ; U1.24 2.195,-2.25 1.25,-3.195 1.25,-4.445 ; v1@1.25,-6.477 1.25,-4.445
  Top Layer w0.8: v1(-13.208,0.254) -11.938,0.254 R6.2
  Top Layer w1: H2.2 -58.801,-23.114 -55.372,-26.543 -43.307,-26.543 -40.075,-23.311 J27.2 J26.2 ; U10.2 U10.4 ; SW1.1 SW1.2 2.02,-64.047 2.725,-64.047 2.813,-64.135 6.481,-64.135 6.731,-64.385 SW2.1 SW3.1 11.045,-64.774 11.045,-62.996 12.446,-61.595 27.481,-61.595 27.89,-61.595 29.602,-61.031 36.951,-55.527 37.957,-54.52 37.957,-47.355 35.306,-44.704 18.033,-44.704 16.529,-43.2 16.529,-41.786 15.115,-41.786 15.112,-41.783 R21.2 12.192,-39.067 11.606,-38.481 7.112,-38.481 6.985,-38.608 ; C4.2 6.985,-37.211 ; C9.2 6.943,-34.586 6.985,-34.544 ; U5.2 6.832,16.573 6.832,15.266 7.62,14.478 R5.1 ; J24.2 18.874,-7.874 18.288,-7.288 18.288,-3.81 19.558,-2.54 26.211,-2.54 U2.1 ; J21.2 42.037,-7.874 42.418,-8.255 C10.2 C17.2 47.498,-10.717 48.084,-11.303 62.663,-11.303 63.249,-10.717 C8.2 ; J6.1 42.418,-33.528 42.93,-33.016 43.946,-33.016 C3.2 ; C3.2@44.071,-32.766 C3.2 ; R4.2 48.002,-40.898 49.071,-40.898 49.657,-40.312 49.657,-38.481 ; R3.2 49.53,-38.608 49.657,-38.481 ; C3.2 C1.2 48.895,-32.766 49.657,-33.528 49.657,-38.481
  Top Layer w2: U10.4 -3.298,-32.889 -2.286,-31.877 v1(2.273,-31.877) ; v1@2.286,-31.877 2.3,-31.891 7.112,-31.891 ; 6.943,-34.586 6.943,-32.06 7.112,-31.891 ; D1.2 6.985,-38.608 6.985,-37.211 6.985,-34.544 ; J24.2 J23.2 J22.2 J21.2 ; J15.2 J16.2 31.75,-18.542 ; J2.1@33.528,-33.528 20.32,-33.528 18.683,-31.891 U6.10 7.112,-31.891 ; J6.1 J2.1 33.528,-32.766 U4.1 33.49,-26.124 33.49,-23.711 31.75,-21.971 31.75,-18.542 ; J18.2 J17.2 31.75,-18.542
  Bottom Layer w0.5: SW1.1 -0.579,-63.52 SW1.2@1.727,-63.52 ; SW1.2 2.008,-63.754 2.77,-62.992 15.199,-62.992 15.491,-63.285 R15.1
  Bottom Layer w0.8: -18.542,0.254 v1(-13.208,0.254)
  Bottom Layer w1: H2.2 H3.2 ; U11.4 -8.128,-43.302 -6.477,-44.953 L1.2 ; v1(1.27,-6.477) 2.273,-7.48 v1(2.273,-31.877)
  Bottom Layer w1.5: J27.2 J26.2 -39.979,-7.524 -39.979,-2.276 -39.101,-1.397 -19.421,-1.397 -18.542,-0.518 -18.542,0.254 -18.542,9.789 -17.536,10.795 6.64,10.795 ; U5.2 6.64,10.795 ; J24.2 20.605,-7.778 19.335,-7.778 17.399,-5.842 9.779,-5.842 8.382,-4.445 8.382,3.302 6.64,5.044 6.64,10.795 ; U2.1 28.072,5.72 31.118,8.766 R2.2 ; J21.2 42.682,-7.874 43.561,-8.753 43.561,-17.526 42.641,-18.446 41.244,-18.446 J18.2
  Bottom Layer w2: J24.2 J23.2 J22.2 J21.2 ; J15.2 J16.2 J17.2
  other v1: -8.128,-39.497
pads on no net: ?. ?.1 H1.1 H1.3 H1.4 H1.7 H1.8 H1.10 J3.3 J7.3 J9.3 J14.3 SW5.3 SW6.3 U1.1 U1.20 U1.29 U1.39 U2.3 U2.4 U4. U5.6 U6.1 U6.2 U6.3 U6.4 U6.7 U6.8 U6.11 U6.12 U6.13 U6.14 U6.15 U6.16 U6.17 U6.18 U7.2
copper on no net: | length 1053.9
  Top Layer w0.3: -65.781,23.941 ccw(c-0.003,0) 65.776,23.941 -65.781,23.941 ; -59.182,-11.303 -59.182,11.176 -48.133,11.176 -48.133,-11.303 -59.182,-11.303 ; 49.149,-9.906 49.149,10.033 58.987,10.033 58.987,-9.906 49.149,-9.906
  Bottom Layer w0.3: -65.778,23.94 ccw(c0,-0.002) 65.778,23.94 -65.778,23.94 ; -59.182,-11.303 -48.133,-11.303 -48.133,11.176 -59.182,11.176 -59.182,-11.303 ; 49.149,-9.906 49.149,10.033 58.987,10.033 58.987,-9.906 49.149,-9.906

## Polygon pours and split planes (outlines as drawn)
GND on Bottom Layer "GND_L02_P001" (solid, pour order 1): -65.92,23.993 ccw(c0,0) 70.15,0 ccw(c0,0) 65.92,23.993 ccw(c65.778,23.941) 65.778,24.092 -65.778,24.092 ccw(c-65.778,23.941)
GND on Top Layer "GND_L01_P000" (solid, pour order 0): -65.92,23.993 ccw(c0,0) 70.15,0 ccw(c0,0) 65.92,23.993 ccw(c65.778,23.941) 65.778,24.092 -65.778,24.092 ccw(c-65.778,23.941)

## Silkscreen, mask and mechanical layers (free items; w line width, h text height)
Top Overlay:
  drawing of 44 lines, arcs and shapes, not listed
  text "SPIN" at -13.335,22.573 h3 r180
  text "Bluetooth" at 16.256,22.563 h3 r180
  text "MOTORS" at -29.464,22.314 h3 r180
  text "STMicroelectronics" at 7.113,-7.61 h1.2
  text "ADC" at 48.514,-21.163 h4
  text "{" at 47.117,-21.214 h15
  text "SHOOT" at -64.96,-23.699 h4
  text "CAP" at -59.817,-31.704 h4
Bottom Overlay:
  drawing of 31 lines, arcs and shapes, not listed
  text "RCJ SOCCER 2025" at 12.142,2.343 h3
  text "PC14 -> Spin     / PC15 -> SHOOT / PB9 -> BOOST PWM / PB3 -> SW1 / PA15 -> ROBOT ID / PA12 -> DIP1 / PA11 -> DIP2 / PB8   -> SERVO1 / PB7   -> SERVO2 /  / PC13 -> MUX Address 4 / PB5   -> MUX Address 3 / PB1   -> MUX Address 2 / PB0   -> MUX Address 1" at 12.192,-28.702 h2
  text "DANGER" at -51.248,-31.741 h2.5
  text "HIGH VOLTAGE" at -51.375,-33.406 h1.4
  text "I2C" at 54.229,-38.562 h4
  text "{" at 46.99,-40.562 h20
Top Solder:
  lines w0.3: -65.778,23.941 ccw(c0,0) 65.778,23.941 -65.778,23.941 ; -59.182,-11.303 -59.182,11.176 -48.133,11.176 -48.133,-11.303 -59.182,-11.303 ; 49.149,-9.906 58.987,-9.906 58.987,10.033 49.149,10.033 49.149,-9.906
Bottom Solder:
  lines w0.3: -65.778,23.941 ccw(c0,0) 65.778,23.941 -65.778,23.941 ; -59.182,-11.303 -59.182,11.176 -48.133,11.176 -48.133,-11.303 -59.182,-11.303 ; 49.149,-9.906 49.149,10.033 58.987,10.033 58.987,-9.906 49.149,-9.906
Mechanical 1:
  lines w0.3: -65.776,23.941 ccw(c0.002,0) 65.781,23.941 -65.776,23.941 ; -59.182,-11.303 -48.133,-11.303 -48.133,11.176 -59.182,11.176 -59.182,-11.303 ; 49.149,-9.906 49.149,10.033 58.987,10.033 58.987,-9.906 49.149,-9.906

## Text inside footprints (layer, text, board x,y; h text height)
C11: Top Overlay "-" at 58.674,15.748 h1.52; Top Overlay "+" at 64.008,15.748 h1.52
C12: Top Overlay "-" at 60.833,5.461 h1.52; Top Overlay "+" at 66.167,5.461 h1.52
C13: Top Overlay "-" at -60.833,11.43 h1.52 r180; Top Overlay "+" at -66.167,11.43 h1.52 r180
C14: Top Overlay "-" at -58.674,21.59 h1.52 r180; Top Overlay "+" at -64.008,21.59 h1.52 r180
C15: Top Overlay "-" at -61.468,1.143 h1.52 r180; Top Overlay "+" at -66.802,1.143 h1.52 r180
j25: Top Overlay "+" at -23.622,-53.594 h1.52 r270; Top Overlay "-" at -40.767,-53.594 h1.52 r270
J29: Top Overlay "-" at -28.321,-62.992 h1.52 r270; Top Overlay "+" at -25.781,-62.992 h1.52 r270
U4: Top Overlay "VCC" at 32.803,-28.983 h0.5; Top Overlay "GND" at 35.343,-28.983 h0.5; Top Overlay "SCL" at 37.883,-28.983 h0.5; Top Overlay "SDA" at 40.423,-28.983 h0.5; Top Overlay "OLED SH1106" at 18.601,-61.161 h0.8
U5: Top Overlay "HC05" at 7.804,11.718 h1.52
U6: Top Overlay "P0" at -13.79,-16.979 h0.8; Top Overlay "P1" at -13.79,-19.519 h0.8; Top Overlay "P2" at -13.79,-22.059 h0.8; Top Overlay "P3" at -13.79,-24.599 h0.8; Top Overlay "3.3V" at -13.79,-34.759 h0.8; Top Overlay "P6" at -13.79,-32.219 h0.8; Top Overlay "P7" at 12.33,-29.679 h0.8; Top Overlay "P8" at 12.33,-27.139 h0.8; Top Overlay "P9" at 12.33,-24.599 h0.8; Top Overlay "SYN" at 11.53,-22.059 h0.8; Top Overlay "BOOT" at 10.731,-19.519 h0.8; Top Overlay "RST" at 11.53,-16.979 h0.8; Top Overlay "P4 (SCL)" at -13.79,-27.266 h0.8; Top Overlay "P5 (SDA)" at -13.79,-29.679 h0.8; Top Overlay "VIN" at 11.664,-32.219 h0.8; Top Overlay "GND" at 11.53,-34.759 h0.8